# Altium PCB HLW8012-Demo.PcbDoc (part 1 of 2)
Units mil, origin at the board's own origin, x right, y up, seen from the top; angles counter-clockwise.
Board outline 2529.72 x 3317.12 mil, 2 copper layers (Top Layer, Bottom Layer); 82 components, 76 nets, 315 pads, 169 vias.
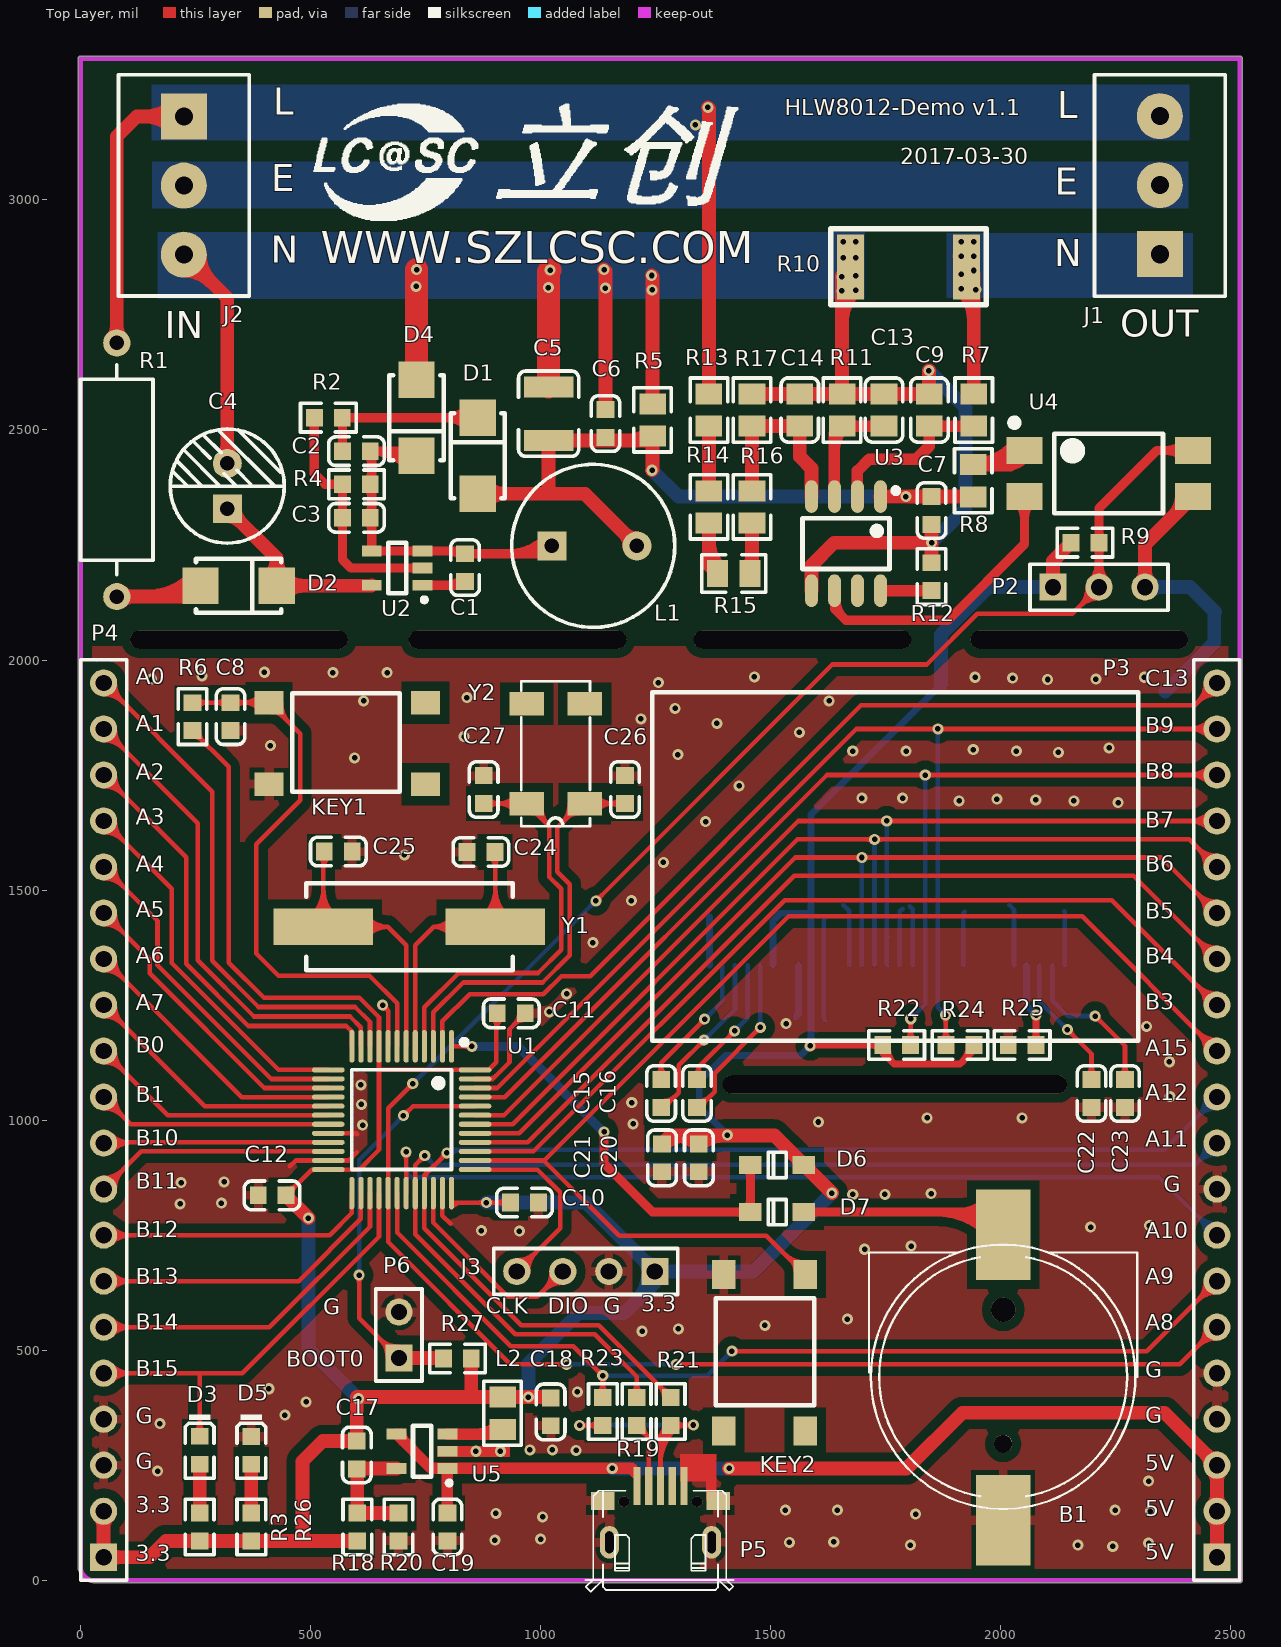
[diagram p0: Top Layer view]
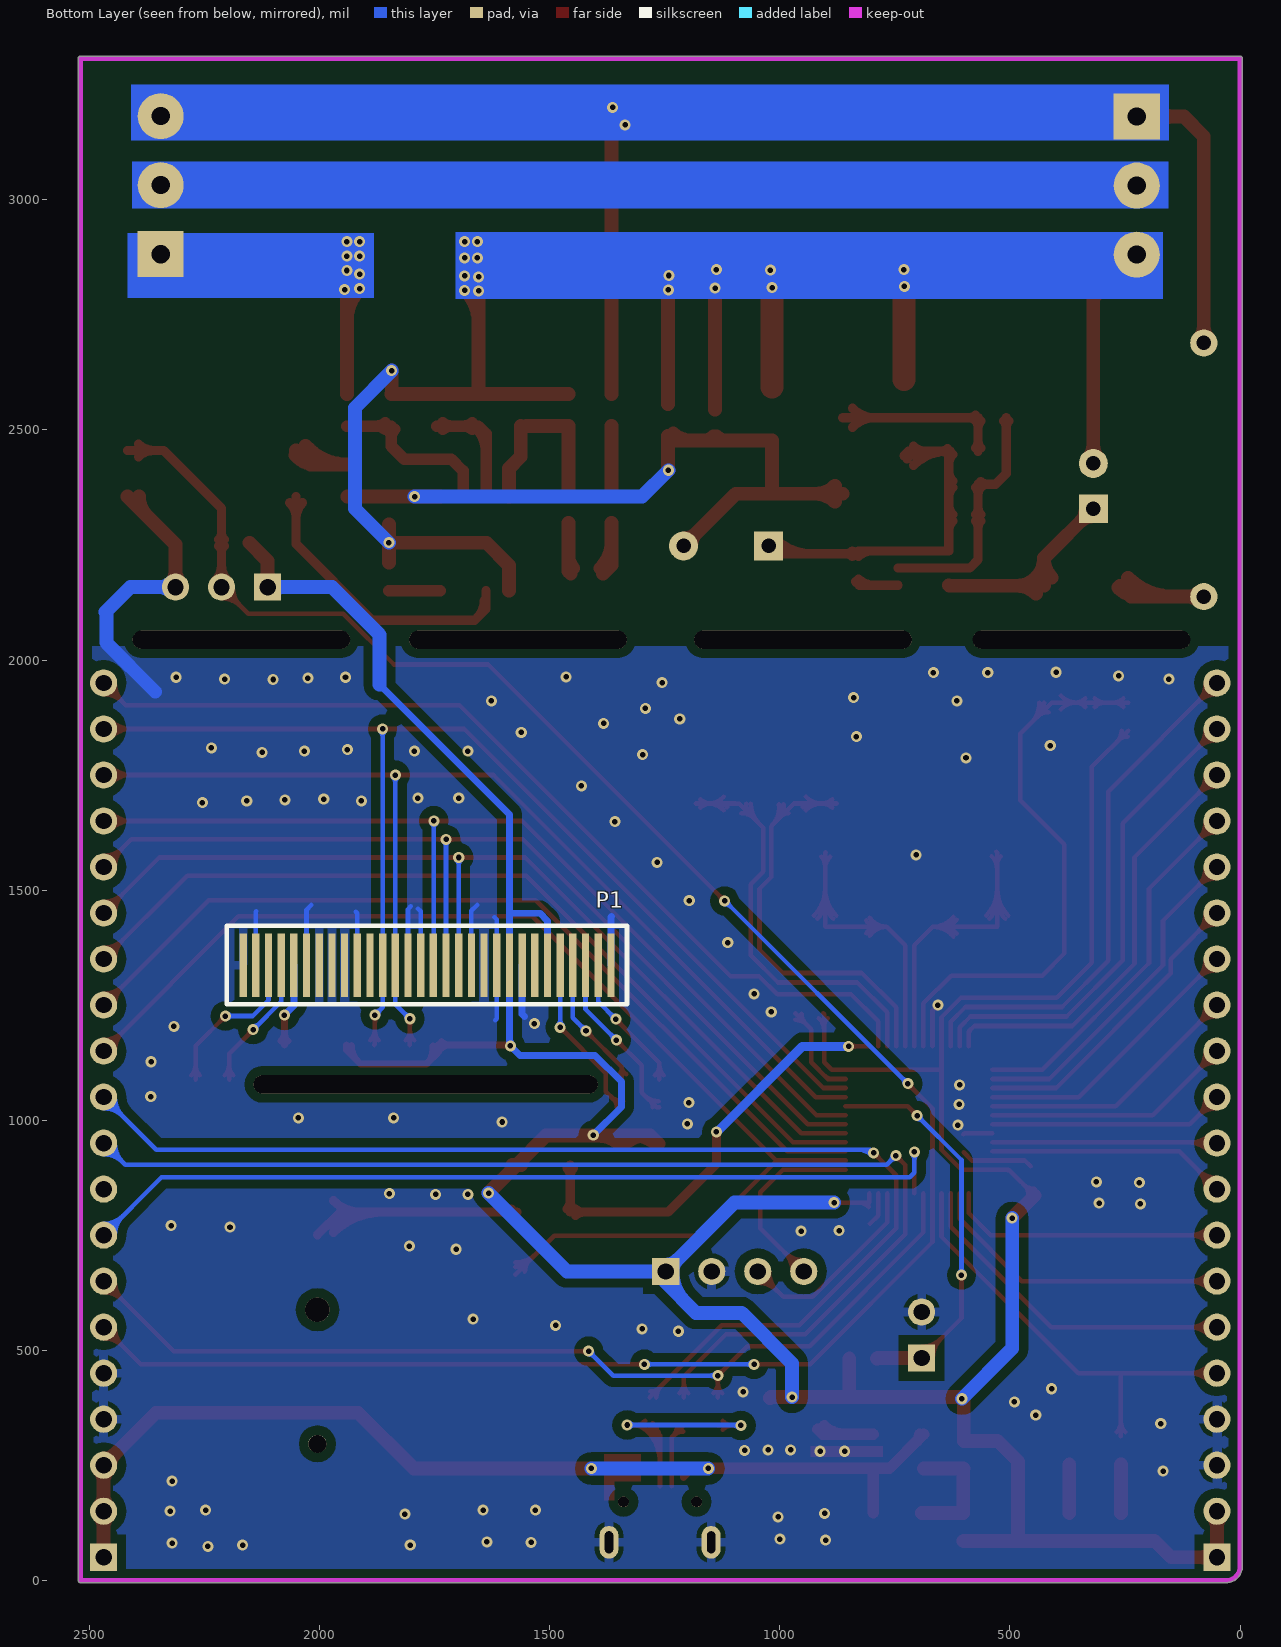
[diagram p1: Bottom Layer view, seen from below]
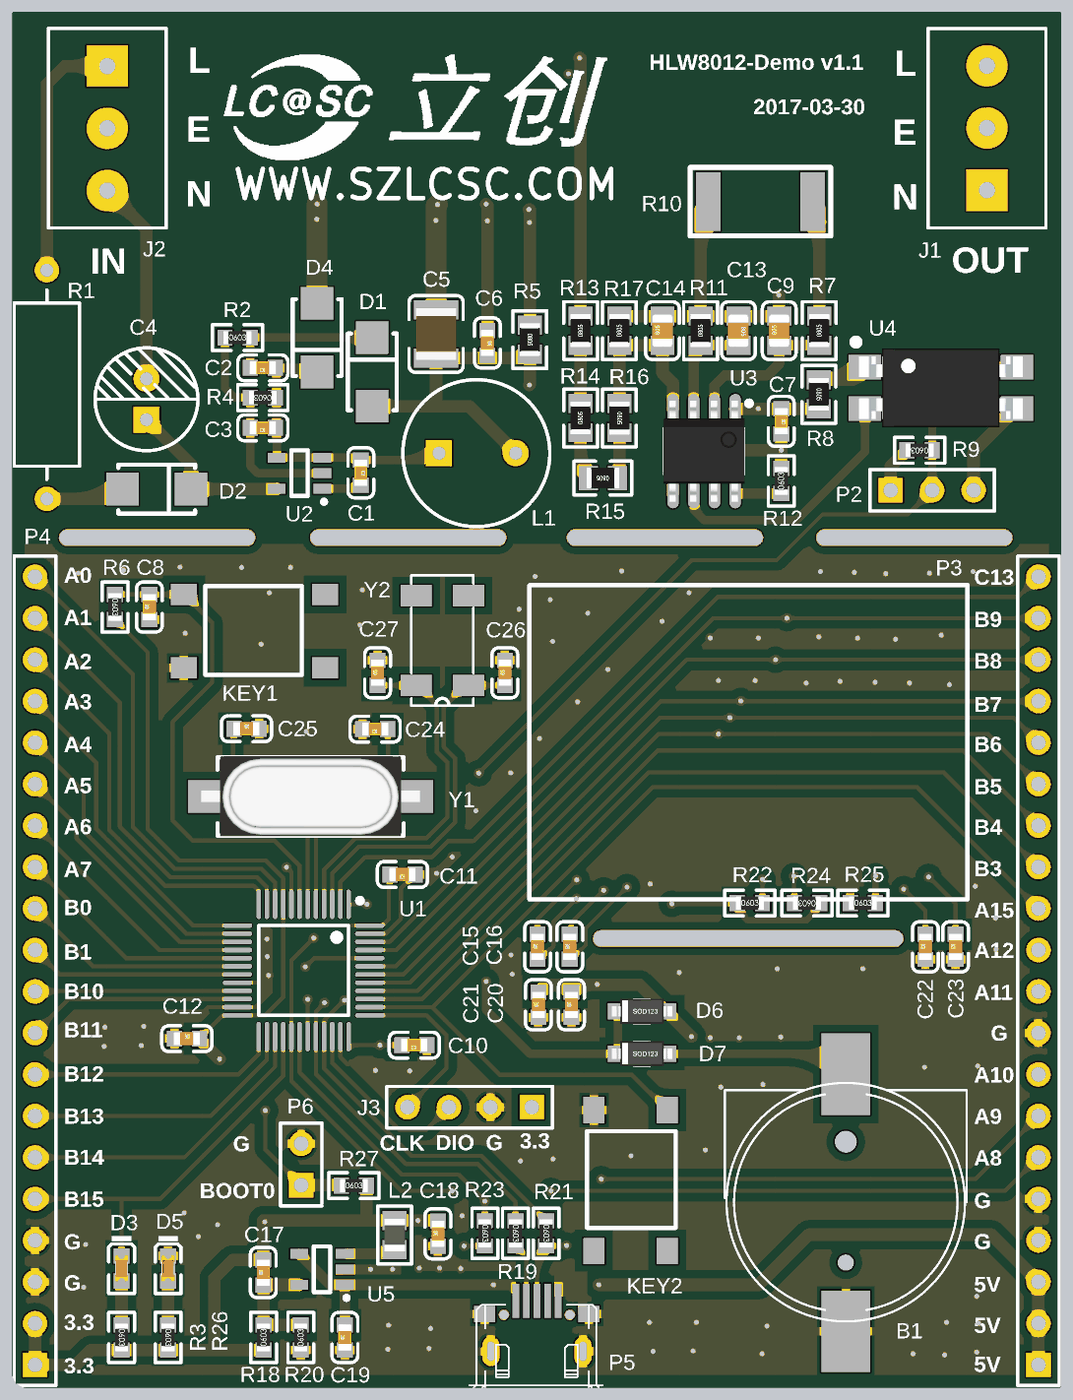
[diagram p3: 3D render of the assembled board from above, using the file's embedded part models]

## Layer stack, top to bottom
Top Solder: solder mask 0.4, Solder Resist, Dk 3.5
Top Layer: signal copper 1.4
Dielectric 1: dielectric 12.6, FR-4, Dk 4.8
Bottom Layer: signal copper 1.4
Bottom Solder: solder mask 0.4, Solder Resist, Dk 3.5

## Board outline
-5.02,30 -5.02,3307.09 cw(c0,3307.09) 0,3312.1 2519.69,3312.1 cw(c2519.69,3307.09) 2524.7,3307.09 2524.7,0 cw(c2519.69,0) 2519.69,-5.02 30,-5.02 cw(c30,30)

## Design rules (kind name [scope] priority, off if disabled: settings)
Clearance Clearance_1 [InPolygon] p1: gap=20
Clearance [All] p2: gap=7
ComponentClearance [All] p1: gap=4 collisioncheckmode=3 verticalgap=4 showdistances=FALSE
DiffPairsRouting [All] p1: maxlimit=10 minlimit=10 mostfreqgap=10 toplayer_minwidth=10 toplayer_maxwidth=15 toplayer_prefwidth=15 bottomlayer_minwidth=10 bottomlayer_maxwidth=15 bottomlayer_prefwidth=15 maxuncoupledlength=500
HoleSize [All] p1: absolutevalues=TRUE maxlimit=500 minlimit=1 maxpercent=80.000 minpercent=20.000
HoleToHoleClearance [All] p1: gap=4 allowstackedmicrovias=TRUE
MinimumSolderMaskSliver [All] p1: minsoldermaskwidth=4
PolygonConnect PolygonConnect_1 [Isvia] p1: connectstyle=Direct reliefconductorwidth=10 reliefentries=4 polygonreliefangle="90 Angle" airgapwidth=10
PolygonConnect [All] p2: connectstyle=Relief reliefconductorwidth=20 reliefentries=4 polygonreliefangle="90 Angle" airgapwidth=10
RoutingVias [All] p1: holewidth=20 width=30 viastyle="Through Hole" minholewidth=10 minwidth=10 maxholewidth=28 maxwidth=50
SilkToSilkClearance [All] p1: silktosilkclearance=4
SilkToSolderMaskClearance [IsPad] p1: minsilkscreentomaskgap=0 clearancetoexposedcopper=TRUE
SolderMaskExpansion [All] p1: expansion=4
Width [All] p1: maxlimit=500 minlimit=10 preferedwidth=10 minimp=50.000000 maximp=50.000000 favimp=50.000000
22 further rules are at their usual default settings.

## Components (designator, comment, footprint, x,y, rotation, side; value= is the part's Value field where it differs from the comment)
B1 "BAT" "BATTERY SOCKET" 2004.92,440.94 r270 top
C1 "2.2μF/10V" LC-0603_C 835.63,2200.79 r270 top
C2 "220nF" LC-0603_C 599.41,2453.74 r180 top
C3 "470pF" LC-0603_C 599.41,2309.06 r180 top
C4 "3.3μF/400V" CAP-ELECT-TH-6.3X7 318.9,2377.95 r90 top
C5 "100μF" LC-1210_C 1017.22,2535.28 r270 top
C6 "1μF" LC-0603_C 1140.75,2513.78 r270 top
C7 "0.1μF" LC-0603_C 1849.41,2324.8 r270 top
C8 "0.1μF" LC-0603_C 325.79,1876.97 r90 top
C9 "33nF" LC-0805_C 1844.49,2543.31 r90 top
C10 "0.1μF" LC-0603_C 964.57,820.87 r180 top
C11 "0.1μF" LC-0603_C 936.02,1232.28 r180 top
C12 "0.1μF" LC-0603_C 416.34,836.61 r0 top
C13 "33nF" LC-0805_C 1746.06,2543.31 r270 top
C14 "33nF" LC-0805_C 1562.99,2543.31 r90 top
C15 "1μF" LC-0603_C 1261.81,1058.07 r90 top
C16 "1μF" LC-0603_C 1339.57,1058.07 r90 top
C17 "22pF (220) 5% 50V" LC-0603_C 600.39,272.64 r90 top
C18 "10uF (106) 10% 10V" LC-0603_C 1021.65,366.14 r90 top
C19 "10uF (106) 10% 10V" LC-0603_C 797.24,116.14 r90 top
C20 "1μF" LC-0603_C 1343.5,918.31 r90 top
C21 "1μF" LC-0603_C 1263.78,918.31 r90 top
C22 "4.7μF" LC-0603_C 2196.85,1057.87 r90 top
C23 "2.2μF" LC-0603_C 2269.69,1057.87 r90 top
C24 "20pF" LC-0603_C 870.08,1582.68 r180 top
C25 "20pF" LC-0603_C 560.04,1583.66 r0 top
C26 "6pF" LC-0603_C 1183.07,1718.5 r90 top
C27 "6pF" LC-0603_C 875.98,1718.5 r90 top
D1 "1N4007" LC-SMA(DO-214AC)_S1 863.19,2443.9 r270 top
D2 "1N4007" LC-SMA(DO-214AC)_S1 343.5,2161.42 r180 top
D3 "POWER" LC-0603_LED_S1 258.86,282.68 r270 top
D4 "US1J(600V 1A)" LC-SMA(DO-214AC)_S1 730.31,2526.57 r90 top
D5 "POWER" LC-0603_LED_S1 371.06,282.48 r270 top
D6 "MBR0520L" LC-SOD-123 1513.78,902.56 r0 top
D7 "MBR0520L" LC-SOD-123 1513.78,800.2 r0 top
J1 "用电接口" 3.81-3P 2346.46,2881.89 r90 top
J2 "供电接口" 3.81-3P 223.43,3181.1 r270 top
J3 "4P/NC" HDR1X4 1248.03,671.26 r180 top
KEY1 "KEY" "KEY_4X4 - 6*6" 409.45,1907.48 r270 top
KEY2 "KEY" "KEY_4X4 - 6*6" 1574.8,664.37 r180 top
L1 "1mH" L-10X14 1114.17,2248.03 r0 top
L2 "2.2uH ±10%" LC-0805_L 917.32,363.19 r90 top
P1 "0.96OLED" OLED_0.96 1367.13,1336.61 r180 bottom
P2 "Header 3" HDR1X3 2113.19,2158.46 r0 top
P3 "Header 20" HDR1X20 2469.49,50.2 r90 top
P4 "Header 20" HDR1X20 50.2,50.2 r90 top
P5 "Micro USB,母头" MicroUSB2 1259.84,143.7 r0 top
P6 "BOOT0" HDR1X2 691.93,483.27 r90 top
R1 "39Ω/1W" R-1W-THT 78.74,2413.39 r270 top
R2 "5.49KΩ" LC-0603_R 538.39,2526.57 r0 top
R3 "2KΩ" LC-0603_R 258.86,116.14 r270 top
R4 "4.99KΩ" LC-0603_R 599.41,2381.89 r180 top
R5 "1KΩ" LC-0805_R 1243.11,2521.65 r270 top
R6 "10KΩ" LC-0603_R 243.11,1876.97 r270 top
R7 "1KΩ,1%" LC-0805_R 1940.94,2543.31 r90 top
R8 "1KΩ,1%" LC-0805_R 1939.96,2389.76 r270 top
R9 "2.2KΩ" LC-0603_R 2183.07,2254.92 r180 top
R10 "2mΩ/25A" R2512 1799.21,2854.33 r180 top
R11 "1KΩ,1%" LC-0805_R 1654.94,2543.31 r90 top
R12 "10KΩ" LC-0603_R 1849.41,2181.1 r90 top
R13 "470KΩ,1%" LC-0805_R 1365.55,2543.31 r90 top
R14 "470KΩ,1%" LC-0805_R 1365.55,2332.68 r90 top
R15 "470KΩ,1%" LC-0805_R 1419.29,2187.99 r180 top
R16 "470KΩ,1%" LC-0805_R 1459.06,2332.68 r270 top
R17 "1KΩ,1%" LC-0805_R 1459.06,2543.31 r90 top
R18 "280KΩ (2803) ±1%" LC-0603_R 601.38,116.14 r90 top
R19 "100Ω" LC-0603_R 1208.66,367.13 r270 top
R20 "62KΩ (6202) ±1%" LC-0603_R 690.94,116.14 r90 top
R21 "100Ω" LC-0603_R 1282.48,367.13 r270 top
R22 "4.7KΩ" LC-0603_R 1773.62,1163.39 r0 top
R23 "1.5KΩ" LC-0603_R 1134.84,367.13 r270 top
R24 "4.7KΩ" LC-0603_R 1911.42,1163.39 r180 top
R25 "910KΩ" LC-0603_R 2046.26,1163.39 r0 top
R26 "1.5KΩ" LC-0603_R 371.06,116.14 r270 top
R27 "4.7KΩ" LC-0603_R 818.9,482.28 r0 top
U1 "STM32F103C8T6" LC-LQFP-48_7x7x05P 697.83,1000.98 r180 top
U2 "MP150" LC-SOT-23-5 687.99,2199.8 r0 top
U3 "HLW8012" LC-SOP-8_150mil 1663.39,2252.95 r180 top
U4 "PC817" LC-SMD-4 2234.25,2405.51 r0 top
U5 "BL8027" LC-SOT-23-5 742.13,280.51 r0 top
Y1 "8M" LC-HC-49SMD 714.57,1420.28 r180 top
Y2 "32768" MC-306 1032.48,1796.26 r90 top

## Footprints (in the part's own frame and the unit in brackets; to place one, negate y for a bottom-side part, rotate by r counter-clockwise, add the part's x,y. Pads: shape width x height; smd on the part's side, far side on the other; paste and mask are expansions set on the pad)
3.81-3P [mm]
  rect 2.54x2.54 hole 1: 1(0,0.025)
  round 2.54 hole 1: 2(3.81,0.025) 3(7.62,0.025)
  silkscreen extent -2.31,-3.58 9.91,3.63
"BATTERY SOCKET" [mm]
  rect 5x3 smd: 1(-7.874,0) 2(7.874,0)
  round 1 hole 1 unplated: 3(3.664,0)
  round 1.35 hole 1.35 unplated: 4(-3.736,0)
  silkscreen extent -7.33,-7.41 7.26,7.41
CAP-ELECT-TH-6.3X7 [mm]
  rect 1.6x1.6 hole 0.8: 1(-1.25,0)
  round 1.6 hole 0.8: 2(1.25,0)
  silkscreen extent -3.15,-3.15 3.15,3.15
HDR1X2 [mm] "Connector; Header; 2 Position"
  rect 1.5x1.5 hole 0.9: 1(0,0)
  round 1.5 hole 0.9: 2(2.54,0)
  silkscreen extent -1.27,-1.27 3.81,1.27
HDR1X3 [mm] "Connector; Header; 3 Position"
  rect 1.5x1.5 hole 0.9: 1(0,0)
  round 1.5 hole 0.9: 2(2.54,0) 3(5.08,0)
  silkscreen extent -1.27,-1.27 6.35,1.27
HDR1X4 [mm] "Connector; Header; 4 Position"
  rect 1.5x1.5 hole 0.9: 1(0,0)
  round 1.5 hole 0.9: 2(2.54,0) 3(5.08,0) 4(7.62,0)
  silkscreen extent -1.27,-1.27 8.89,1.27
HDR1X20 [mm] "Connector; Header; 20 Position"
  rect 1.5x1.5 hole 0.9: 1(0,0)
  round 1.5 hole 0.9: 2(2.54,0) 3(5.08,0) 4(7.62,0) 5(10.16,0) 6(12.7,0) 7(15.24,0) 8(17.78,0) 9(20.32,0) 10(22.86,0) 11(25.4,0) 12(27.94,0) 13(30.48,0) 14(33.02,0) 15(35.56,0) 16(38.1,0) 17(40.64,0) 18(43.18,0) 19(45.72,0) 20(48.26,0)
  silkscreen extent -1.27,-1.27 49.53,1.27
"KEY_4X4 - 6*6" [mm]
  rect 1.3x1.6 smd: 1(0,0) 2(4.496,0) 3(0,8.636) 4(4.496,8.636)
  silkscreen extent -0.51,1.3 4.93,7.21
L-10X14 [mm]
  rect 1.6x1.6 hole 0.8: 1(-2.286,0)
  round 1.6 hole 0.8: 2(2.413,0)
  silkscreen extent -4.5,-4.5 4.5,4.5
LC-0603_C [mm]
  rect 0.93x0.98 smd: 1(-0.77,0) 2(0.77,0)
  silkscreen extent -1.53,-0.79 1.54,0.79, body extent -0.8,-0.4 0.8,0.4, height 0.3
LC-0603_LED_S1 [mm]
  rect 0.93x0.98 smd: A(0.77,0) K(-0.77,0)
  silkscreen extent -1.98,-0.79 1.54,0.79, body extent -0.8,-0.4 0.8,0.4, height 0.6
LC-0603_R [mm]
  rect 0.93x0.98 smd: 1(-0.77,0) 2(0.77,0)
  silkscreen extent -1.53,-0.79 1.54,0.79, body extent -0.85,-0.4 0.85,0.4, height 0.56
LC-0805_C [mm]
  rect 1.16x1.47 smd: 1(-0.89,0) 2(0.89,0)
  silkscreen extent -1.77,-1.04 1.77,1.04, body extent -1,-0.62 1,0.63, height 0.77
LC-0805_L [mm]
  rect 1.16x1.47 smd: 1(-0.89,0) 2(0.89,0)
  silkscreen extent -1.77,-1.04 1.77,1.03, body extent -1.02,-0.64 1.03,0.64, height 0.6
LC-0805_R [mm]
  rect 1.16x1.47 smd: 1(-0.89,0) 2(0.89,0)
  silkscreen extent -1.77,-1.04 1.77,1.03, body extent -1,-0.62 1,0.63, height 0.49
LC-1210_C [mm]
  rect 1.16x2.72 smd: 1(-1.475,0) 2(1.475,0)
  silkscreen extent -2.36,-1.66 2.35,1.66, body extent -1.6,-1.25 1.6,1.25, height 1.3
LC-HC-49SMD [mm]
  rect 5.5x2 smd: 1(-4.75,0) 2(4.75,0)
  silkscreen extent -5.7,-2.4 5.7,2.4, body extent -6.7,-2.46 6.7,2.44, height 4
LC-LQFP-48_7x7x05P [mm]
  oval 0.28x1.8 smd mask+0.051: 1(-2.75,-4.05) 2(-2.25,-4.05) 3(-1.75,-4.05) 4(-1.25,-4.05) 5(-0.75,-4.05) 6(-0.25,-4.05) 7(0.25,-4.05) 8(0.75,-4.05) 9(1.25,-4.05) 10(1.75,-4.05) 11(2.25,-4.05) 12(2.75,-4.05) 25(2.75,4.05) 26(2.25,4.05) 27(1.75,4.05) 28(1.25,4.05) 29(0.75,4.05) 30(0.25,4.05) 31(-0.25,4.05) 32(-0.75,4.05) 33(-1.25,4.05) 34(-1.75,4.05) 35(-2.25,4.05) 36(-2.75,4.05)
  oval 1.8x0.28 smd mask+0.051: 13(4.05,-2.75) 14(4.05,-2.25) 15(4.05,-1.75) 16(4.05,-1.25) 17(4.05,-0.75) 18(4.05,-0.25) 19(4.05,0.25) 20(4.05,0.75) 21(4.05,1.25) 22(4.05,1.75) 23(4.05,2.25) 24(4.05,2.75) 37(-4.05,2.75) 38(-4.05,2.25) 39(-4.05,1.75) 40(-4.05,1.25) 41(-4.05,0.75) 42(-4.05,0.25) 43(-4.05,-0.25) 44(-4.05,-0.75) 45(-4.05,-1.25) 46(-4.05,-1.75) 47(-4.05,-2.25) 48(-4.05,-2.75)
  silkscreen extent -3.6,-4.42 2.75,2.75
LC-SMA(DO-214AC)_S1 [mm]
  rect 2x2 smd: 1(2.1,0) 2(-2.1,0)
  silkscreen extent -2.35,-1.5 2.35,1.5
LC-SMD-4 [mm]
  rect 2x1.5 smd: 1(-4.65,1.27) 2(-4.65,-1.27) 3(4.65,-1.27) 4(4.65,1.27)
  silkscreen extent -5.4,-2.2 3,3, body extent -5.02,-2.42 5.01,2.42, height 3.9
LC-SOD-123 [mm]
  rect 1.25x1 smd: 1(1.475,0) 2(-1.475,0)
  silkscreen extent -0.5,-0.7 0.5,0.7, body extent -1.85,-0.77 1.85,0.78, height 1.35
LC-SOP-8_150mil [mm]
  oval 0.7x1.8 smd: 1(-1.905,-2.6) 2(-0.635,-2.6) 3(0.635,-2.6) 4(1.905,-2.6) 5(1.905,2.6) 6(0.635,2.6) 7(-0.635,2.6) 8(-1.905,2.6)
  silkscreen extent -2.9,-3.07 2.4,1.4, body extent -2.5,-3.1 2.5,3.1, height 1.75
LC-SOT-23-5 [mm]
  rect 1.1x0.6 smd: 1(1.4,-0.95) 2(1.4,0) 3(1.4,0.95) 4(-1.4,0.95) 5(-1.4,-0.95)
  silkscreen extent -0.5,-1.87 1.63,1.4
MC-306 [mm]
  rect 1.3x1.9 smd: 1(-2.75,-1.6) 2(2.75,-1.6) 3(2.75,1.6) 4(-2.75,1.6)
  silkscreen extent -4,-1.9 4,1.9
MicroUSB2 [mm] "Connector; USB1.1, Type A, Thru-Hole; 4 Position; Vertical"
  rect 1.3x1 smd: 0(-3.188,0.737) 0(3.188,0.737)
  oval 1.05x1.8 hole 0.45 slot 1.2 at 90 deg: 0(-2.807,-1.549) 0(2.832,-1.549)
  rect 0.4x2.1 smd: 1(-1.283,1.549) 2(-0.635,1.549) 3(0.013,1.549) 4(0.66,1.549) 5(1.308,1.549)
  round 0.6 hole 0.6: ""(-2.007,0.686) ""(2.032,0.686)
  silkscreen extent -4.13,-4.28 4.05,1.3
OLED_0.96 [mm]
  rect 0.4x3.5 smd: 1(0,0) 2(-0.7,0) 3(-1.4,0) 4(-2.1,0) 5(-2.8,0) 6(-3.5,0) 7(-4.2,0) 8(-4.9,0) 9(-5.6,0) 10(-6.3,0) 11(-7,0) 12(-7.7,0) 13(-8.4,0) 14(-9.1,0) 15(-9.8,0) 16(-10.5,0) 17(-11.2,0) 18(-11.9,0) 19(-12.6,0) 20(-13.3,0) 21(-14,0) 22(-14.7,0) 23(-15.4,0) 24(-16.1,0) 25(-16.8,0) 26(-17.5,0) 27(-18.2,0) 28(-18.9,0) 29(-19.6,0) 30(-20.3,0)
  silkscreen extent -21.21,-2.16 0.89,2.18
R2512 [mm]
  rect 1.5x3.6 smd: 1(-3.2,0) 2(3.2,0)
  silkscreen extent -4.3,-2.1 4.3,2.1
R-1W-THT [mm]
  round 1.5 / inner oval 1.5x2 / far side round 1.5 hole 0.8: 1(-7,0)
  round 1.5 hole 0.8: 2(7,0)
  silkscreen extent -5.8,-2 5.8,2

## Part data
B1: "电池"
C1 C2 C3 C5 C6 C7 C9 C13 C14: library part CAP, "贴片电容"
C4: library part "Cap Pol1", "直插电解电容"
C8 C10 C11 C12 C15 C16 C20 C21 C22 C23 C24 C25 C26 C27: library part Cap, "贴片电容"
C17: library part "0402 22pF (220) 5% 50V", "贴片电容"
C18 C19: library part "0603 10uF (106) 10% 10V", "贴片电容"
D1 D2 D4: library part "Diode 1N5408", "贴片二极管"
D3: library part L, "发光二极管"
D5: library part LED1, "发光二极管"
D6 D7: library part "Diode 18TQ045", "贴片肖特基二极管"
J1 J2: library part Port-3P, "直插接线端子"
J3: library part "Header 4", "接口"
KEY1 KEY2: "贴片轻触开关"
L1: library part IND_8, "直插绕线电感"
L2: library part "0805 2.2uH 10%", "贴片电感"
P1: "接口"
P2: "Header, 3-Pin"
P3 P4: "Header, 20-Pin"
P5: library part microUSB, "接口"
P6: library part "Header 2", "Header, 2-Pin"
R1 R2 R3 R4 R5 R6 R7 R8 R9 R10 R11 R12 R13 R14 R15 R16 R17 R19 R21 R22 R23 R24 R25 R26 R27: library part 电阻, "贴片电阻"
R18 R20: library part "0805 62KΩ (6202) 1%", "贴片电阻"
U1: library part STM32F103CBT6, "IC"
U2 U3: "IC"
U4: library part PS2501L-1-F3-A, "IC"
U5: library part DC-DC, "IC"
Y1 Y2: library part XTAL_1, "晶振（直插）"

## Free pads (board coordinates)
  oval 472.44x39.37 hole 39.37 slot 472.44 at 0 deg paste+0: 0(344.49,2044.29) 0(949.8,2044.29) 0(1568.9,2044.29) 0(2170.28,2044.29)
  oval 748.03x39.37 hole 39.37 slot 748.03 at 0 deg paste+0: 0(1769.69,1077.76)

## Via types
v1: diameter 24, hole 12, Top Layer to Bottom Layer, tented both sides, 169 vias

## Nets (pads, with @x,y where several pads share a name; then routed paths per layer and width w, separated by ;. In a path a pad name is that pad's centre, name@x,y a point inside that pad or via, vN(x,y) a via of type N, cw(c..) or ccw(c..) an arc to the next point about the centre after c; other vN are vias at no path point)
+3.3V: C10.2 C11.2 C12.2 C17.2 C18.2 C20.2 C21.2 D6.1 J3.1 L2.2 P1.6 P1.9 P2.1 P4.1 P4.2 R3.2 R6.2 R9.2 R18.1 R22.1 R24.1 R26.2 R27.2 U1.9 U1.24 U1.36 U1.48 | length 9346.3
  Top Layer w10: R6.2@243.11,1846.65 321.85,1767.91 321.85,1342.52 398.62,1265.75 606.3,1265.75 648.62,1223.43 U1.9@648.62,1160.43 648.62,936.02 605.31,892.72 U1.24@538.39,892.72 502.76,892.72 C12.2@446.65,836.61 ; R6.2@244.09,1833.35 cw(c244.09,1803.6) 265.13,1824.63 ; R6.2@257.4,1846.65 ccw(c291.9,1846.65) 267.51,1822.26 ; C12.2@446.65,850.91 ccw(c446.65,885.41) 471.05,861.01 ; C12.2@459.96,837.6 cw(c489.71,837.6) 468.67,858.63 ; v1(495.08,787.4) v1@495.08,788.19 ; 497.85,887.81 cw(c508.46,877.19) U1.24@508.46,892.2 ; 648.62,1109.25 U1.48@857.28,1109.25 886.81,1109.25 903.54,1125.98 903.54,1230.12 C11.2@905.71,1232.28 ; U1.36@806.1,841.54 806.1,820.87 v1(881.89,820.87) C10.2@934.25,820.87 ; U1.36@806.46,811.25 cw(c829.67,788.04) 829.67,820.87 ; v1@876.94,815.92 ccw(c864.99,803.97) 864.99,820.87 ccw(c864.99,837.77) v1@876.94,825.82 ; v1@886.84,815.92 cw(c898.79,803.97) 898.79,820.87 cw(c898.79,837.77) v1@886.84,825.82 ; C11.2@896.3,1221.89 cw(c878.81,1204.4) 903.54,1204.4 ; 903.54,1193.95 cw(c943.06,1193.95) C11.2@915.12,1221.89 ; C10.2@924.84,811.46 ccw(c902.13,788.74) 902.13,820.87 ccw(c902.13,852.99) C10.2@924.84,830.28
  Top Layer w15: v1(1585.63,1161.42) 1587.6,1163.39 R22.1@1743.31,1163.39 1743.31,1146.46 1767.72,1122.05 ; v1@1588.81,1158.24 cw(c1601.25,1145.8) 1601.25,1163.39 ; R22.1@1735.67,1155.74 ccw(c1717.22,1137.3) 1717.22,1163.39 ccw(c1717.22,1189.48) R22.1@1735.67,1171.03 ; R22.1@1739.14,1162.88 ccw(c1761.96,1160.28) 1745.72,1144.04 ; R22.1@1754.04,1161.18 ccw(c1801.46,1155.79) 1767.72,1122.05 ; 1916.18,1126.81 ccw(c1880.6,1162.4) R24.1@1930.93,1162.4 ; R24.1@1941.73,1163.39 1941.73,1152.36 1911.42,1122.05 1767.72,1122.05
  Top Layer w30: P4.1@39.92,60.47 ccw(c15.12,85.27) 50.2,85.27 ccw(c85.27,85.27) 60.47,60.47 ccw(c85.27,85.27) 85.27,50.2 ccw(c85.27,15.12) P4.1@60.47,39.92 ; P4.2@39.92,139.92 cw(c15.12,115.12) 50.2,115.12 cw(c85.27,115.12) P4.2@60.47,139.92 ; P4.2@50.2,150.2 P4.1@50.2,50.2 149.61,50.2 185.24,85.83 R3.2@258.86,85.83 R26.2@371.06,85.83 479.33,85.83 ; C12.2@446.65,836.61 446.65,835.83 v1(495.08,787.4) ; R18.1@601.38,85.83 479.33,85.83 ; R27.2@849.21,482.28 849.21,399.02 848.43,398.23 ; C18.2@1021.65,396.46 1019.88,398.23 v1(973.43,398.23) L2.2@917.32,398.23 848.43,398.23 ; C21.2@1263.78,948.62 1281.69,966.54 1507.87,966.54 D6.1@1571.85,902.56 v1(1632.87,841.54) ; C21.2@1267.1,946.28 cw(c1315.99,897.39) 1315.99,966.54 ; 1291.29,966.54 cw(c1291.29,897.39) C20.2@1340.18,946.28 ; C20.2@1346.83,946.28 cw(c1395.72,897.39) v1@1395.72,966.54 ; D6.1@1555.45,918.96 cw(c1539.05,902.56) D6.1@1562.24,902.56 ; D6.1@1581.46,902.56 ccw(c1604.65,902.56) D6.1@1588.25,886.16 ; P2.1@2102.92,2168.74 ccw(c2078.12,2193.54) 2113.19,2193.54 ccw(c2148.26,2193.54) P2.1@2123.46,2168.74 ; P2.1@2113.19,2158.46 2113.19,2215.35 R9.2@2152.76,2254.92 ; 479.33,85.83 482.28,88.78 482.28,258.86 526.38,302.95 C17.2@600.39,302.95 600.39,398.23 848.43,398.23
  Bottom Layer w15: v1(1405.51,967.52) 1344.49,1028.54 1344.49,1083.66 1401.57,1140.75 1564.96,1140.75 v1(1585.63,1161.42) 1587.6,1163.39 P1.9@1587.6,1336.61 1587.6,1664.37 1870.08,1946.85 ; P1.6@1504.92,1336.61 1504.92,1433.07 1521.65,1449.8 1587.6,1449.8 ; v1@1582.45,1164.6 ccw(c1570.01,1177.03) 1587.6,1177.03
  Bottom Layer w30: v1(495.08,787.4) 495.08,503.94 v1(604.33,394.69) ; v1(881.89,820.87) 1098.43,820.87 J3.1@1248.03,671.26 ; v1(973.43,398.23) 973.43,471.46 1082.68,580.71 1182.09,580.71 1248.03,646.65 J3.1@1248.03,671.26 ; 1205.83,604.45 ccw(c1139.03,671.26) 1233.5,671.26 ccw(c1198.43,671.26) 1223.23,696.06 ccw(c1248.03,720.86) J3.1@1248.03,685.79 ; J3.1@1258.3,660.99 cw(c1283.1,636.19) 1283.1,671.26 cw(c1283.1,706.33) J3.1@1258.3,681.53 ; v1(1632.87,841.54) 1462.6,671.26 J3.1@1248.03,671.26 ; 1870.08,1946.85 1870.08,2055.12 1973.43,2158.46 P2.1@2113.19,2158.46 ; P2.1@2102.92,2148.19 ccw(c2078.12,2123.39) 2078.12,2158.46 ccw(c2078.12,2193.54) P2.1@2102.92,2168.74
+5V: C19.2 P3.1 P3.2 P3.3 P5.1 U5.1 U5.4 | length 2590.5
  Top Layer w15: 1199.8,233.27 1209.34,223.73 1209.34,231.6 1199.8,241.14 ccw(c1206.83,248.17) P5.1@1209.25,238.53
  Top Layer w25: U5.4@687.01,317.91 761.81,243.11 U5.1@797.24,243.11 ; U5.4@696.16,317.91 ccw(c718.26,317.91) 702.63,302.29 ; C19.2@797.24,146.46 U5.1@797.24,243.11 ; 1199.8,241.14 1197.83,243.11 U5.1@797.24,243.11
  Top Layer w30: v1(1409.45,243.11) 1795.28,243.11 1916.34,364.17 2355.51,364.17 P3.3@2469.49,250.2 P3.2@2469.49,150.2 P3.1@2469.49,50.2 ; P3.3@2454.96,250.2 ccw(c2419.89,250.2) 2444.69,275 ccw(c2469.49,299.8) P3.3@2469.49,264.72 ; P3.1@2459.22,60.47 ccw(c2434.42,85.27) 2469.49,85.27 ccw(c2504.56,85.27) P3.1@2479.76,60.47 ; P3.2@2459.22,139.92 cw(c2434.42,115.12) 2469.49,115.12 cw(c2504.56,115.12) P3.2@2479.76,139.92 ; P3.2@2459.22,160.47 ccw(c2434.42,185.27) 2469.49,185.27 ccw(c2504.56,185.27) P3.2@2479.76,160.47 ; P3.3@2459.22,239.92 cw(c2434.42,215.12) 2469.49,215.12 cw(c2504.56,215.12) P3.3@2479.76,239.92
  Bottom Layer w30: v1(1155.51,243.11) v1(1409.45,243.11)
A+5V: C5.2 C6.2 C7.1 D1.1 L1.2 R5.2 R8.2 U3.1 | length 1832.1
  Top Layer w30: D1.1@863.19,2361.22 1015.75,2361.22 ; D1.1@880.42,2343.99 cw(c922.02,2302.39) 922.02,2361.22 cw(c922.02,2420.06) D1.1@880.42,2378.45 ; 1116.69,2477.21 ccw(c1116.69,2506.54) C6.2@1137.43,2485.8 ; C6.2@1144.07,2485.8 ccw(c1164.81,2506.54) 1164.81,2477.21 ; L1.2@1192.68,2248.03 ccw(c1152.85,2248.03) 1181.01,2276.19 ccw(c1209.17,2304.35) L1.2@1209.17,2264.53 ; 1195.4,2477.21 ccw(c1195.4,2528.23) R5.2@1231.47,2492.15 ; L1.2@1209.17,2248.03 1095.98,2361.22 1015.75,2361.22 ; v1(1242.13,2412.4) 1243.11,2413.39 R5.2@1243.11,2486.61 1233.71,2477.21 C5.2@1017.22,2477.21 1017.22,2362.69 1015.75,2361.22 ; U3.1@1738.39,2355.32 v1(1793.8,2355.32) 1849.21,2355.32 C7.1@1849.41,2355.12 1939.57,2355.12 R8.2@1939.96,2354.72
  Bottom Layer w30: v1(1242.13,2412.4) 1299.21,2355.32 v1(1793.8,2355.32)
AC220V-L: J1.3 J2.1 R1.1 R13.2 | length 1423.7
  Top Layer w30: R1.1@68.47,2699.25 ccw(c43.67,2724.05) 78.74,2724.05 ccw(c113.81,2724.05) R1.1@89.01,2699.25 ; R1.1@78.74,2688.98 78.74,3137.8 122.05,3181.1 J2.1@224.41,3181.1 ; J2.1@199.66,3156.35 ccw(c139.91,3096.6) 139.91,3181.1 ccw(c139.91,3265.6) J2.1@199.66,3205.85 ; v1(1363.19,3200.79) 1365.55,3198.43 R13.2@1365.55,2578.35
  other v1: 1336.28,3162.79
AC220V-N: C4.2 C5.1 C6.1 C7.2 C9.2 C13.1 C14.2 D4.1 J2.3 R5.1 R10.2 R11.2 R12.2 R17.2 U3.5 | length 3500.2
  Top Layer w30: J2.3@224.43,2846.1 cw(c224.43,2761.6) 284.17,2821.35 cw(c343.92,2881.1) J2.3@259.43,2881.1 ; J2.3@224.43,2881.1 318.9,2786.63 C4.2@318.9,2427.17 ; C4.2@307.23,2438.83 ccw(c279.07,2466.99) 318.9,2466.99 ccw(c358.72,2466.99) C4.2@330.56,2438.83 ; v1(1137.8,2848.43) 1140.75,2845.47 C6.1@1140.75,2544.09 ; v1(1241.14,2835.63) 1243.11,2833.66 R5.1@1243.11,2556.69 ; R17.2@1459.06,2578.35 C14.2@1562.99,2578.35 R11.2@1654.94,2578.35 ; U3.5@1588.39,2150.59 1588.39,2205.51 1637.8,2254.92 v1(1849.41,2254.92) ; 1654.94,2733.78 cw(c1752.44,2733.78) R10.2@1683.5,2802.72 ; R10.2@1660.07,2875.52 cw(c1631.88,2859.12) R10.2@1654.95,2836.05 ; R10.2@1673.23,2854.33 R10.2@1654.94,2836.05 ; R10.2@1687.05,2836.87 ccw(c1671.43,2819.56) R10.2@1654.95,2836.05 ; v1(1843.5,2628.94) 1843.5,2579.33 C9.2@1844.49,2578.35 R11.2@1654.94,2578.35 ; R12.2@1849.41,2211.42 v1(1849.41,2254.92) ; C7.2@1849.41,2294.49 v1(1849.41,2254.92) ; R11.2@1654.94,2578.35 R10.2@1654.94,2836.05
  Top Layer w50: D4.1@730.31,2609.25 v1(730.31,2848.43) ; C5.1@1017.22,2593.35 1017.22,2843.99 v1(1020.67,2847.44)
  Bottom Layer w30: v1(1843.5,2628.94) 1843.5,2627.95 1923.23,2548.23 1923.23,2328.74 v1(1849.41,2254.92)
  other v1: 1654.53,2802.17 1685.04,2803.15 1242.13,2804.13 1140.75,2808.07 1016.73,2809.06 729.33,2812.01 1654.53,2832.68 1685.04,2834.65 1657.48,2874.02 1685.04,2874.02 1657.48,2909.45 1685.04,2909.45
BOOT0: P6.1 R27.1 U1.44 | length 1172.9
  Top Layer w10: v1@600.37,658.44 cw(c588.42,646.49) 605.32,646.49 cw(c622.21,646.49) v1@610.26,658.44 ; v1(605.31,663.39) 605.31,569.88 P6.1@691.93,483.27 ; P6.1@667.4,483.27 ccw(c608.19,483.27) 650.06,525.14 ccw(c691.93,567.01) P6.1@691.93,507.8 ; P6.1@677.4,483.27 ccw(c642.33,483.27) 667.13,508.07 ccw(c691.93,532.87) P6.1@691.93,497.8 ; v1(701.76,1009.85) 722.43,1030.51 U1.44@857.28,1030.51 ; v1@701.76,1016.85 ccw(c701.76,1033.75) 713.71,1021.8 ccw(c725.66,1009.85) v1@708.76,1009.85
  Top Layer w30: P6.1@691.93,483.27 787.6,483.27 R27.1@788.58,482.28 ; P6.1@702.2,473 cw(c727,448.2) 727,483.27 cw(c727,518.34) P6.1@702.2,493.54
  Bottom Layer w10: v1@600.37,668.34 ccw(c588.42,680.29) 605.32,680.29 ccw(c622.21,680.29) v1@610.26,668.34 ; v1(605.31,663.39) 605.31,913.4 v1(701.76,1009.85) ; v1@694.76,1009.85 cw(c677.86,1009.85) 689.81,997.9 cw(c701.76,985.95) v1@701.76,1002.85
DGND: B1.2 C8.1 C10.1 C11.1 C12.1 C18.1 C19.1 C20.1 C21.1 C22.1 C23.1 C24.2 C25.2 C26.2 C27.2 D5.K J3.2 KEY1.2 KEY2.2 P1.1 P1.8 P1.10 P1.11 P1.12 P1.16 P1.17 P1.21 P1.22 P1.23 P1.24 P1.25 P1.29 P1.30 P2.3 P3.4 P3.5 P3.9 P4.3 P4.4 P5.0 P5.5 P6.2 R20.1 R25.1 U1.8 U1.20 U1.23 U1.35 U1.47 U4.3 U5.2 | length 2692.8
  Top Layer w10: 454.72,899.61 467.52,912.4 U1.23@538.39,912.4 582.68,912.4 600.39,930.12 ; U1.20@538.39,971.46 599.41,971.46 601.38,969.49 ; v1(656.5,1250) 668.31,1238.19 ; v1@656.55,1243 cw(c656.69,1226.58) 668.31,1238.19 ; v1@663.5,1249.94 ccw(c679.92,1249.8) 668.31,1238.19 ; U1.8@668.31,1160.43 668.31,1238.19 ; U1.35@786.42,841.54 786.42,792.32 804.13,774.61 ; U1.47@857.28,1089.57 895.67,1089.57 932.09,1125.98 932.09,1198.03 C11.1@966.34,1232.28 ; U1.47@887.2,1090.08 ccw(c887.2,1111.75) 902.53,1096.43 ; 941.94,1207.89 cw(c966.34,1183.49) C11.1@966.34,1217.99 ; 944.32,1210.26 ccw(c923.28,1231.3) C11.1@953.03,1231.3
  Top Layer w30: P2.3@2302.92,2168.74 ccw(c2278.12,2193.54) 2313.19,2193.54 ccw(c2348.26,2193.54) P2.3@2323.46,2168.74 ; P2.3@2313.19,2158.46 2313.19,2251.38 U4.3@2417.32,2355.51 ; 2375.72,2313.91 ccw(c2334.12,2355.51) U4.3@2392.95,2355.51
  Bottom Layer w10: 1618.11,1217.52 1615.16,1220.47 P1.10@1615.16,1336.61 1615.16,1436.02 1620.08,1440.94 ; 1657.48,1467.52 1670.28,1454.72 P1.12@1670.28,1336.61 ; P1.16@1780.51,1336.61 1780.51,1453.74 1786.42,1459.65 ; 1802.17,1464.57 1808.07,1458.66 P1.17@1808.07,1336.61 ; P1.21@1918.31,1336.61 1918.31,1449.8 1921.26,1452.76 ; 2018.7,1467.52 2028.54,1457.68 P1.25@2028.54,1336.61 ; 2137.8,1453.74 2138.78,1452.76 P1.29@2138.78,1336.61
  Bottom Layer w15: 1366.14,1442.91 1367.13,1441.93 P1.1@1367.13,1336.61 ; 1555.12,1225.39 1560.04,1230.32 P1.8@1560.04,1336.61
  Bottom Layer w30: P2.3@2313.19,2158.46 2411.42,2158.46 2465.55,2104.33 2463.58,2102.36 2463.58,2037.4 2357.28,1931.1 ; P2.3@2323.46,2148.19 cw(c2348.26,2123.39) 2348.26,2158.46 cw(c2348.26,2193.54) P2.3@2323.46,2168.74
  other v1: 2243.11,73.82 1803.15,76.77 2167.32,76.77 2320.87,80.71 1540.35,82.68 1636.81,83.66 900.59,87.6 1000,89.57 1003.94,137.8 1814.96,143.7 902.56,145.67 2324.8,150.59 1531.5,152.56 1644.69,152.56 2248.03,152.56 2320.87,215.55 167.32,237.2 859.25,280.51 912.4,280.51 1076.77,282.48 976.38,283.46 1025.59,283.46 172.24,340.55 443.9,359.25 490.16,387.8 1079.72,409.45 409.45,416.34 1220.47,541.34 1299.21,546.26 1487.2,554.13 1666.34,567.91 1703.74,719.49 1805.12,726.38 953.74,758.86 871.06,759.84 2194.88,767.72 2322.83,770.67 216.54,817.91 306.1,819.88 1678.15,838.58 1748.03,838.58 1848.43,840.55 218.5,864.17 312.01,866.14 613.19,989.17 1200.79,992.13 1603.35,996.06 1839.57,1004.92 2046.26,1004.92 610.24,1034.45 1197.83,1038.39 2367.13,1051.18 609.25,1076.77 2366.14,1126.97 2316.93,1203.74 1533.46,1209.65 1018.7,1235.24 1056.1,1274.61 1113.19,1385.83 1196.85,1477.36 1266.73,1560.04 703.74,1576.77 1358.27,1648.62 2254.92,1689.96 1909.45,1693.9 2158.46,1693.9 2075.79,1695.87 1991.14,1697.83 1697.83,1699.8 1786.42,1699.8 1431.1,1726.38 595.47,1787.4 1298.23,1794.29 2125,1799.21 1678.15,1802.17 1794.29,1802.17 2033.46,1802.17 1939.96,1805.12 2235.24,1809.06 412.4,1813.98 833.66,1833.66 1562.01,1842.52 1382.87,1862.2 1217.52,1872.05 1292.32,1894.69 615.16,1911.42 1626.97,1911.42 839.57,1918.31 1255.91,1950.79 2101.38,1957.68 154.53,1958.66 2206.69,1958.66 2025.59,1960.63 1943.9,1962.6 2312.01,1962.6 1464.57,1963.58 263.78,1965.55 548.23,1972.44 666.34,1972.44 399.61,1973.43
NetB1_1: B1.1 D7.1 | length 757.8
  Top Layer w20: D7.1@1571.85,800.2 1955.67,800.2 B1.1@2004.92,750.94 ; D7.1@1583.62,793.35 cw(c1600.15,776.82) 1600.15,800.2 cw(c1600.15,823.58) D7.1@1583.62,807.05 ; 1862.63,800.2 cw(c1862.63,648.03) B1.1@1970.23,755.63 ; 1910.35,800.2 ccw(c1910.35,884.89) B1.1@1970.23,825 ; 1910.92,800.2 cw(c1910.92,696.31) B1.1@1984.38,769.77
NetC1_1: C1.1 C2.1 C3.1 D4.2 L1.1 R4.1 U2.3 U2.4 | length 1229.4
  Top Layer w20: C3.1@623.85,2302.2 cw(c602.07,2280.41) 632.87,2280.41 ; C3.1@623.85,2315.91 ccw(c602.07,2337.7) 632.87,2337.7 ; R4.1@623.85,2375.03 cw(c602.06,2353.25) 632.87,2353.25 ; R4.1@623.85,2388.75 ccw(c602.06,2410.53) 632.87,2410.53 ; C2.1@623.85,2446.88 cw(c602.07,2425.1) 632.87,2425.1 ; C2.1@635.6,2447.87 cw(c649.78,2433.69) 649.78,2453.74 cw(c649.78,2473.8) C2.1@635.6,2459.61 ; C2.1@635.65,2453.74 cw(c635.65,2349.23) D4.2@709.55,2423.13 ; 683.17,2453.74 ccw(c683.17,2491.04) D4.2@709.55,2464.67 ; 683.93,2453.74 cw(c683.93,2397.51) D4.2@723.69,2437.27 ; D4.2@730.31,2443.9 720.47,2453.74 C2.1@629.72,2453.74 632.87,2450.59 U2.4@632.87,2237.2 U2.3@743.11,2237.2 829.53,2237.2 C1.1@835.63,2231.1 1007.24,2231.1 L1.1@1024.17,2248.03 ; 799.86,2237.2 cw(c799.86,2196.32) C1.1@828.77,2225.23 ; C1.1@842.49,2225.23 cw(c856.67,2211.05) 856.67,2231.1 cw(c856.67,2251.16) C1.1@842.49,2236.98 ; 931.41,2231.1 ccw(c931.41,2340.8) L1.1@1008.97,2263.23 ; 979.69,2231.1 ccw(c979.69,2292.51) L1.1@1023.12,2249.09
NetC1_2: C1.2 U2.1 | length 133.3
  Top Layer w20: U2.1@743.11,2162.4 827.56,2162.4 C1.2@835.63,2170.47 ; 795.11,2162.4 ccw(c795.11,2210.01) C1.2@828.77,2176.35
NetC2_2: C2.2 D1.2 R2.2 | length 573.4
  Top Layer w20: R2.2@562.83,2519.72 cw(c547.7,2504.59) 569.09,2504.59 ; C2.2@563.22,2460.6 ccw(c549.04,2474.78) 569.09,2474.78 ccw(c589.15,2474.78) C2.2@574.97,2460.6 ; C2.2@569.09,2453.74 569.09,2526.18 R2.2@568.7,2526.57 D1.2@863.19,2526.57 ; 569.09,2506.49 cw(c587.81,2506.49) R2.2@574.58,2519.72 ; R2.2@574.58,2520.7 cw(c588.76,2506.52) 588.76,2526.57 cw(c588.76,2546.63) R2.2@574.58,2532.45 ; D1.2@842.42,2505.81 ccw(c792.28,2455.67) 792.28,2526.57 ccw(c792.28,2597.48) D1.2@842.42,2547.34
NetC3_2: C3.2 R2.1 R4.2 U2.2 | length 694.8
  Top Layer w20: R2.1@502.2,2519.72 cw(c488.02,2505.54) 508.07,2505.54 cw(c528.13,2505.54) R2.1@513.95,2519.72 ; R2.1@508.07,2526.57 508.07,2405.31 531.5,2381.89 R4.2@569.09,2381.89 569.09,2218.31 587.6,2199.8 U2.2@743.11,2199.8 ; C3.2@563.22,2302.2 cw(c549.04,2288.02) 569.09,2288.02 cw(c589.15,2288.02) C3.2@574.97,2302.2 ; C3.2@563.22,2315.91 ccw(c549.04,2330.09) 569.09,2330.09 ccw(c589.15,2330.09) C3.2@574.97,2315.91 ; R4.2@563.22,2375.03 cw(c549.04,2360.85) 569.09,2360.85 cw(c589.15,2360.85) R4.2@574.97,2375.03 ; R4.2@563.22,2376.02 ccw(c549.04,2361.83) 549.04,2381.89 ccw(c549.04,2401.94) R4.2@563.22,2387.76
NetC4_1: C4.1 D2.2 U2.5 | length 666.3
  Top Layer w30: C4.1@318.9,2312.24 cw(c318.9,2272.42) 347.06,2300.58 cw(c375.22,2328.74) C4.1@335.39,2328.74 ; C4.1@318.9,2328.74 426.18,2221.46 D2.2@426.18,2161.42 631.89,2161.42 U2.5@632.87,2162.4 ; D2.2@408.95,2178.65 ccw(c367.35,2220.25) 426.18,2220.25 ccw(c485.02,2220.25) 443.41,2178.65 ccw(c485.02,2220.25) 485.02,2161.42 ccw(c485.02,2102.58) D2.2@443.41,2144.19
NetC9_1: C9.1 R7.1 U3.2 | length 491.6
  Top Layer w25: U3.2@1688.39,2355.32 1688.39,2410.83 1713.58,2436.02 1815.94,2436.02 1844.49,2464.57 C9.1@1844.49,2508.27 R7.1@1940.94,2508.27 ; C9.1@1837.18,2500.96 cw(c1819.54,2483.32) 1844.49,2483.32 cw(c1869.44,2483.32) C9.1@1851.8,2500.96 ; C9.1@1857.9,2500.96 cw(c1875.54,2483.32) 1875.54,2508.27 cw(c1875.54,2533.22) C9.1@1857.9,2515.58 ; R7.1@1927.53,2500.96 ccw(c1909.89,2483.32) 1909.89,2508.27 ccw(c1909.89,2533.22) R7.1@1927.53,2515.58
NetC13_2: C13.2 R11.1 U3.3 | length 376.9
  Top Layer w25: U3.3@1638.39,2355.32 1638.39,2491.71 R11.1@1654.94,2508.27 C13.2@1746.06,2508.27 ; 1638.39,2458.07 cw(c1699.04,2458.07) R11.1@1656.15,2500.96 ; R11.1@1668.35,2500.96 cw(c1686,2483.32) 1686,2508.27 cw(c1686,2533.22) R11.1@1668.35,2515.58 ; C13.2@1732.65,2500.96 ccw(c1715.01,2483.32) 1715.01,2508.27 ccw(c1715.01,2533.22) C13.2@1732.65,2515.58
NetC14_1: C14.1 R16.1 R17.1 U3.4 | length 396.1
  Top Layer w30: R16.1@1459.06,2367.72 R17.1@1459.06,2508.27 C14.1@1551.18,2508.27 ; C14.1@1562.99,2508.27 1562.99,2441.93 1588.39,2416.54 U3.4@1588.39,2355.32
NetC15_1: C15.1 P1.3 | length 482.4
  Top Layer w10: C15.1@1261.81,1027.76 1267.91,1027.76 1300.2,1060.04 1300.2,1119.09 v1(1355.31,1174.21) ; C15.1@1262.8,1041.06 ccw(c1262.8,1085.55) 1294.25,1054.09 ; C15.1@1276.1,1027.76 cw(c1295.87,1027.76) 1281.89,1041.74 ; v1@1348.32,1174.21 cw(c1331.42,1174.21) 1343.37,1162.26 cw(c1355.31,1150.31) v1@1355.31,1167.21
  Bottom Layer w10: v1(1355.31,1174.21) 1422.24,1241.14 P1.3@1422.24,1336.61 ; v1@1355.31,1181.21 ccw(c1355.31,1198.11) 1367.26,1186.16 ccw(c1379.21,1174.21) v1@1362.31,1174.21
NetC15_2: C15.2 P1.2 | length 406.8
  Top Layer w10: C15.2@1252.4,1097.8 ccw(c1229.68,1120.51) 1261.81,1120.51 ccw(c1293.94,1120.51) C15.2@1271.22,1097.8 ; C15.2@1261.81,1088.39 1261.81,1125 v1(1356.3,1219.49) ; v1@1349.3,1219.49 cw(c1332.4,1219.49) 1344.35,1207.54 cw(c1356.3,1195.59) v1@1356.3,1212.49
  Bottom Layer w10: v1(1356.3,1219.49) 1394.69,1257.87 P1.2@1394.69,1336.61 ; v1@1356.3,1226.49 ccw(c1356.3,1243.39) 1368.25,1231.44 ccw(c1380.2,1219.49) v1@1363.3,1219.49
NetC16_1: C16.1 P1.5 | length 468.1
  Top Layer w10: C16.1@1340.55,1041.06 ccw(c1340.55,1080.79) 1368.64,1052.7 ; C16.1@1343.5,1027.56 1377.95,1062.01 1377.95,1102.36 v1(1477.36,1201.77) ; C16.1@1353.86,1027.76 cw(c1378.38,1027.76) 1361.04,1045.1 ; v1@1470.36,1201.77 cw(c1453.46,1201.77) 1465.41,1189.82 cw(c1477.36,1177.87) v1@1477.36,1194.77
  Bottom Layer w10: v1@1472.41,1206.72 ccw(c1460.46,1218.67) 1477.36,1218.67 ccw(c1494.26,1218.67) v1@1482.31,1206.72 ; v1(1477.36,1201.77) P1.5@1477.36,1336.61
NetC16_2: C16.2 P1.4 | length 382.5
  Top Layer w10: C16.2@1334.04,1099.99 ccw(c1324.99,1116.14) 1343.5,1116.14 ; C16.2@1343.5,1088.19 1343.5,1116.14 ; 1343.5,1113.38 ccw(c1365.55,1113.38) C16.2@1349.96,1097.8 ; v1@1414.26,1193.9 cw(c1397.36,1193.9) 1409.31,1181.95 cw(c1421.26,1170) v1@1421.26,1186.9 ; v1(1421.26,1193.9) 1343.5,1116.14
  Bottom Layer w10: v1(1421.26,1193.9) 1449.8,1222.44 P1.4@1449.8,1336.61 ; v1@1421.26,1200.9 ccw(c1421.26,1217.8) 1433.21,1205.85 ccw(c1445.16,1193.9) v1@1428.26,1193.9
NetC17_1: C17.1 R18.2 R20.2 U5.5 | length 272.8
  Top Layer w30: U5.5@687.01,243.11 601.18,243.11 C17.1@600.39,242.32 601.38,241.34 R18.2@601.38,146.46 R20.2@690.94,146.46
NetC22_2: C22.2 P1.27 | length 398.9
  Top Layer w10: v1@2144.69,1189.85 cw(c2144.69,1172.95) 2156.63,1184.9 cw(c2168.58,1196.85) v1@2151.69,1196.85 ; v1(2144.69,1196.85) 2196.85,1144.69 C22.2@2196.85,1088.19 ; C22.2@2187.44,1097.6 ccw(c2164.72,1120.32) 2196.85,1120.32 ccw(c2228.98,1120.32) C22.2@2206.26,1097.6
  Bottom Layer w10: P1.27@2083.66,1336.61 2083.66,1257.87 v1(2144.69,1196.85) ; v1@2137.69,1196.85 ccw(c2120.79,1196.85) 2132.74,1208.8 ccw(c2144.69,1220.75) v1@2144.69,1203.85